# Altium PCB MPU6050EVM.PcbDoc
Units mil, origin at the board's own origin, x right, y up, seen from the top; angles counter-clockwise.
Board outline 6000 x 4000 mil, 2 copper layers (Top Layer, Bottom Layer); 35 components, 26 nets, 129 pads, 0 vias.
Unrouted connection lines stored in the file: 79.
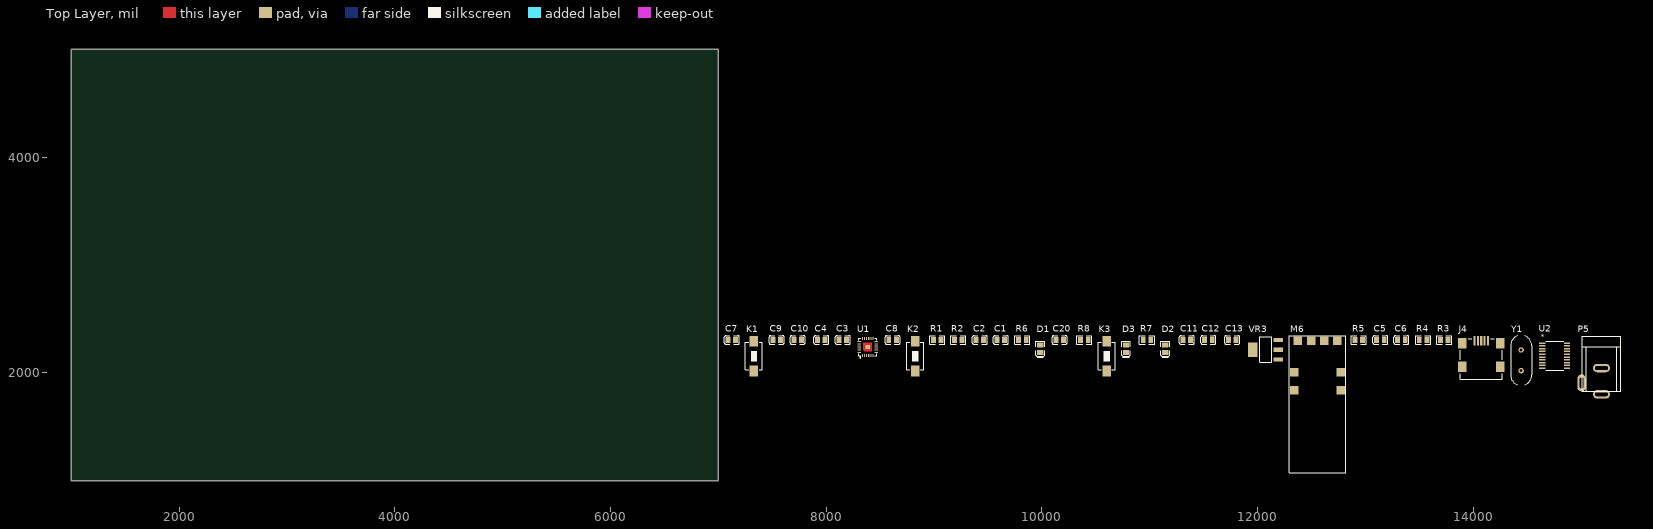
[diagram p0: Top Layer view]
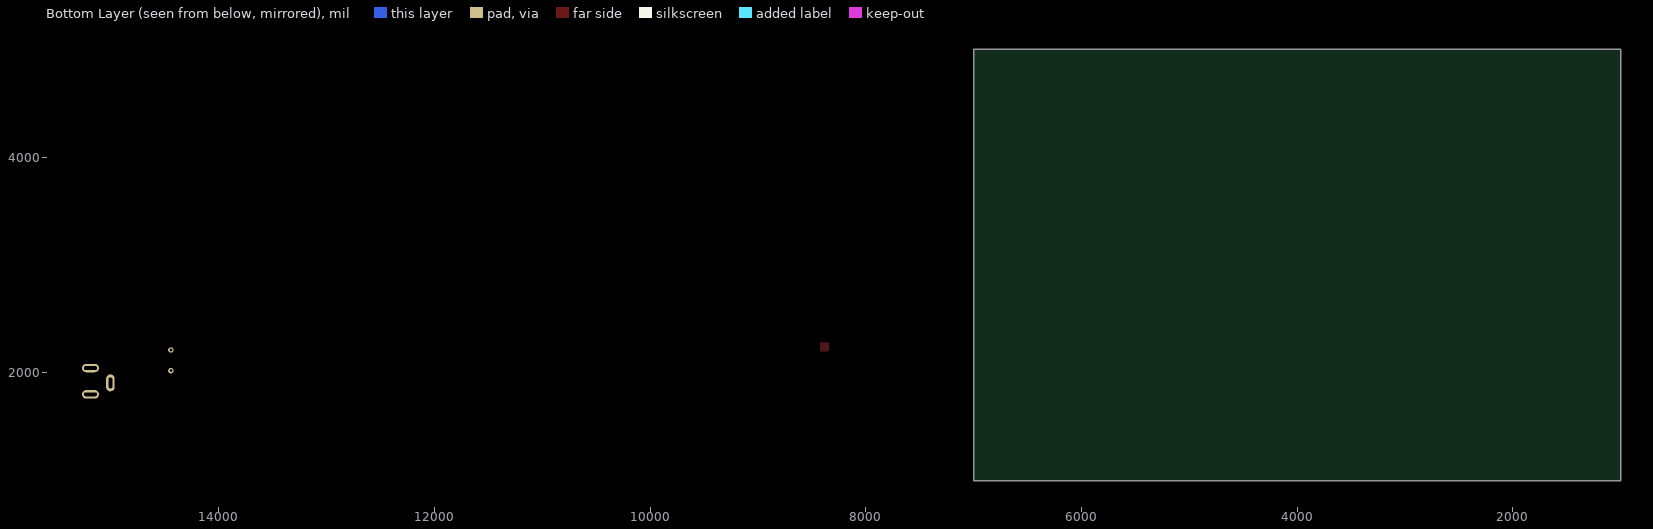
[diagram p1: Bottom Layer view, seen from below]

## Layer stack, top to bottom
Top Solder: solder mask 0.4, Solder Resist, Dk 3.5
Top Layer: signal copper 1.4
Dielectric 1: dielectric 12.6, FR-4, Dk 4.8
Bottom Layer: signal copper 1.4
Bottom Solder: solder mask 0.4, Solder Resist, Dk 3.5

## Board outline
1000,1000 7000,1000 7000,5000 1000,5000

## Design rules (kind name [scope] priority, off if disabled: settings)
Clearance [All] p1: gap=6 ignorepadtopadclearanceinfootprint=FALSE
HoleSize [All] p1: absolutevalues=TRUE maxlimit=10000 minlimit=12 maxpercent=80.000 minpercent=20.000
MinimumSolderMaskSliver [All] p1: minsoldermaskwidth=0
PolygonConnect [All] p1: thpad.connectstyle=Relief thpad.reliefconductorwidth=10 thpad.reliefentries=4 thpad.polygonreliefangle="90 Angle" thpad.airgapwidth=10 smdpad.connectstyle=Relief smdpad.reliefconductorwidth=10 smdpad.reliefentries=4 smdpad.polygonreliefangle="90 Angle" smdpad.airgapwidth=10 via.connectstyle=Direct via.reliefconductorwidth=10 via.reliefentries=4 via.polygonreliefangle="90 Angle" via.airgapwidth=10
RoutingVias [All] p1: holewidth=12 width=24 viastyle="Through Hole" minholewidth=12 minwidth=24 maxholewidth=28 maxwidth=50
SilkToSilkClearance [All] p1: silktosilkclearance=0
SilkToSolderMaskClearance [IsPad] p1: minsilkscreentomaskgap=0 clearancetoexposedcopper=TRUE
SolderMaskExpansion [All] p1: expansion=4
Width [All] p1: maxlimit=1000 minlimit=6 preferedwidth=10
26 further rules are at their usual default settings.

## Components (designator, comment, footprint, x,y, rotation, side; value= is the part's Value field where it differs from the comment)
C1 "2.2nF" 0805_C 9620,2305 r0 top
C2 "100nF" 0805_C 9425,2305 r0 top
C3 "100nF" 0805_C 8155,2305 r0 top
C4 "100nF" 0805_C 7955,2305 r0 top
C5 "9pF" 0805_C 13140,2305 r0 top
C6 "9pF" 0805_C 13335,2305 r0 top
C7 "100nF" 0805_C 7125,2305 r0 top
C8 "100nF" 0805_C 8615,2305 r0 top
C9 "100nF" 0805_C 7540,2305 r0 top
C10 "100nF" 0805_C 7735,2305 r0 top
C11 "100nF" 0805_C 11345,2305 r0 top
C12 "10uF" 0805_C 11545,2305 r0 top
C13 "10uF" 0805_C 11765,2305 r0 top
C20 "100nF" 0805_C 10165,2305 r0 top
D1 "翠绿 0805" 0805_LED_S1 9985,2225 r90 top
D2 "红灯 0805" 0805_LED_S1 11145,2225 r90 top
D3 "红灯 0805" 0805_LED_S1 10780,2225 r90 top
J4 "UsbOtg" USB-MINI-A 14075,2175 r0 top
K1 "SW" SWITCH 7330,2155 r0 top
K2 "SW" SWITCH 8825,2155 r0 top
K3 "SW" SWITCH 10600,2155 r0 top
M6 "Pl2303EVM" PI230203EVM 12555,1790 r0 top
P5 "Power" DC-005 15190,2045 r90 top
R1 "4.7KΩ" 0805_R 9030,2305 r0 top
R2 "4.7KΩ" 0805_R 9225,2305 r0 top
R3 "10MΩ" 0805_R 13730,2305 r0 top
R4 "100KΩ" 0805_R 13535,2305 r0 top
R5 "100KΩ" 0805_R 12940,2305 r0 top
R6 "1KΩ" 0805_R 9820,2305 r0 top
R7 "1KΩ" 0805_R 10975,2305 r0 top
R8 "1KΩ" 0805_R 10395,2305 r0 top
U1 "MPU6050" "QFN24 4x4_L" 8385,2240 r0 top
U2 "STM32F03xFxP" TSSOP20 14755,2160 r0 top value=Value
VR3 "AMS1117-3.3" SOT-223 12075,2215 r0 top
Y1 "8MHz" XTAL_US 14445,2020 r90 top

## Footprints (in the part's own frame and the unit in brackets; to place one, negate y for a bottom-side part, rotate by r counter-clockwise, add the part's x,y. Pads: shape width x height; smd on the part's side, far side on the other; paste and mask are expansions set on the pad)
0805_C [mm]
  rect 1.16x1.47 smd: 1(-0.89,0) 2(0.89,0)
  silkscreen extent -1.77,-1.04 1.77,1.04, body extent -1,-0.62 1,0.63, height 0.77
0805_LED_S1 [mm]
  rect 1.16x1.47 smd: A(0.89,0) K(-0.89,0)
  silkscreen extent -2.24,-1.04 1.77,1.03, body extent -1.01,-0.62 1.01,0.62, height 1.1
0805_R [mm]
  rect 1.16x1.47 smd: 1(-0.89,0) 2(0.89,0)
  silkscreen extent -1.77,-1.04 1.77,1.03, body extent -1,-0.62 1,0.63, height 0.49
DC-005 [mm] "5.5*2.1mm，DC30V,2.5A"
  oval 2x4 hole 0.8 slot 3 at 90 deg: 1(-6.2,0) 2(0,0)
  oval 4x2 hole 0.8 slot 2.5 at 0 deg: 2(-3.5,4.7)
  silkscreen extent -5.48,-4.5 7.5,4.5, body extent -6.55,-4.5 7.5,4.8, height 11.2
PI230203EVM [mm]
  rect 2x2 smd: 0(-5.405,1.206) 0(5.52,5.524) 1(-5.405,5.524) 1(-4.578,12.955) 2(1.603,12.955) 2(5.52,1.206) 3(4.693,12.955) 4(-1.488,12.955)
  Top Overlay keep-out lines w0.102: -6.575,-18.225 6.675,-18.225 6.675,14.1 -6.575,14.1 -6.575,-18.225
  silkscreen extent -6.58,-18.23 6.68,14.1, body extent -6,-18.28 6.12,13.62, height 1
"QFN24 4x4_L" [mm] "24脚，长x宽x高：4x4x1mm，脚距：0.5mm"
  rect 0.25x0.8 smd: 1(-1.25,-2)
  oval 0.25x0.8 smd: 2(-0.75,-2) 3(-0.25,-2) 4(0.25,-2) 5(0.75,-2) 6(1.25,-2) 13(1.25,2) 14(0.75,2) 15(0.25,2) 16(-0.25,2) 17(-0.75,2) 18(-1.25,2)
  oval 0.8x0.25 smd: 7(2,-1.25) 8(2,-0.75) 9(2,-0.25) 10(2,0.25) 11(2,0.75) 12(2,1.25) 19(-2,1.25) 20(-2,0.75) 21(-2,0.25) 22(-2,-0.25) 23(-2,-0.75) 24(-2,-1.25)
  rect 1x1 smd: 25(0,0)
  Top Layer region: -1,1 1,1 1,-1 -0.75,-1 -1,-0.75
  silkscreen extent -2.11,-2.6 2.11,2.11, body extent -2.01,-2.01 2.01,2.01, height 0.95
SOT-223 [mm]
  rect 2.2x1 smd: 1(3,-2.3) 2(3,0) 3(3,2.3)
  rect 2.2x3.5 smd: 2(-3,0)
  silkscreen extent -1.4,-3 1.4,3, body extent -3.49,-3.24 3.49,3.24, height 1.64
SWITCH [mm]
  rect 2x2.5 smd: 1(0,3.5) 2(0,-3.5)
  silkscreen extent -2,-3.25 2,3.25, body extent -2.03,-3.23 2.03,3.25, height 1.2
TSSOP20 [mil]
  rect 58x14 smd: 1(-115,115.16) 2(-115,89.57) 3(-115,63.98) 4(-115,38.39) 5(-115,12.8) 6(-115,-12.8) 7(-115,-38.39) 8(-115,-63.98) 9(-115,-89.57) 10(-115,-115.16) 11(115,-115.16) 12(115,-89.57) 13(115,-63.98) 14(115,-38.39) 15(115,-12.8) 16(115,12.8) 17(115,38.39) 18(115,63.98) 19(115,89.57) 20(115,115.16)
  silkscreen extent -83,-135 83,135, body extent -130,-130 130,130, height 47
USB-MINI-A [mm] "MINI型USB，7.9*7.5*4.1mm"
  rect 2x2.5 smd: 0(-4.45,-3) 0(-4.45,2.5) 0(4.45,-3) 0(4.45,2.5)
  rect 0.5x2.3 smd: 1(-1.6,3.108) 2(-0.8,3.108) 3(0,3.108) 4(0.8,3.108) 5(1.6,3.108)
  round 0.6 hole 0.9 unplated: MH1(2.2,0) MH2(-2.2,0)
  silkscreen extent -4.95,-5.95 4.95,3.65, body extent -4.75,-6 4.75,3.7, height 3.95
XTAL_US [mil]
  round 50 hole 28: 1(0,0) 2(192.13,0)
  silkscreen extent -131,-98 323,98

## Part data
C1 C2 C3 C4: library part "0805 2.2nF (222) 5% 50V", "贴片电容", Package=0805, SuppliersPartNumber=C28260, ComponentLink1Description=供应商链接, ComponentLink1URL=http://www.szlcsc.com/product/details_29010.html, Supplier=LC
C5 C6 C7 C8 C9 C10 C20: library part "0805 10nF (103) 10% 50V", "贴片电容", Package=0805, SuppliersPartNumber=C1710, ComponentLink1Description=供应商链接, ComponentLink1URL=http://www.szlcsc.com/product/details_2062.html, Supplier=LC
C11 C12 C13: library part "0805 10uF (106) 10% 25V", "贴片电容", Package=0805, SuppliersPartNumber=C15850, ComponentLink1Description=供应商链接, ComponentLink1URL=http://www.szlcsc.com/product/details_16532.html, Supplier=LC
D1: library part "0805 翠绿", "发光二极管", Package=0805, SuppliersPartNumber=C2297, ComponentLink1Description=供应商链接, ComponentLink1URL=http://www.szlcsc.com/product/details_2670.html, Supplier=LC
D2 D3: library part "0805 红灯", "发光二极管", Package=0805, SuppliersPartNumber=C2295, ComponentLink1Description=供应商链接, ComponentLink1URL=http://www.szlcsc.com/product/details_2668.html, Supplier=LC
K1 K2 K3: "Switch"
R1 R2: library part "0805 4.7KΩ (4701) 1%", "贴片电阻", Package=0805, SuppliersPartNumber=C17673, ComponentLink1Description=供应商链接, ComponentLink1URL=http://www.szlcsc.com/product/details_18361.html, Supplier=LC
R3 R4 R5 R6 R7 R8: library part "0805 10KΩ (1002) 1%", "贴片电阻", Package=0805, SuppliersPartNumber=C17414, ComponentLink1Description=供应商链接, ComponentLink1URL=http://www.szlcsc.com/product/details_18102.html, Supplier=LC
U2: "Mcu", Manufacturer_Part_Number=stm32f03xfxp, C="Copyright (C) 2016 Accelerated Designs. All rights reserved", Copyright="Copyright (C) 2016 Accelerated Designs. All rights reserved", RefDes=RefDes, Type=Type, Vendor=STMicroelectronics
VR3: library part "SOT-223 AMS1117-3.3", "低压差线性稳压(LDO)", Package=SOT-223, SuppliersPartNumber=C6186, ComponentLink1Description=供应商链接, ComponentLink1URL=http://www.szlcsc.com/product/details_6652.html, Supplier=LC
Y1: library part XTAL, "Crystal Oscillator", LatestRevisionDate=17-Jul-2002, LatestRevisionNote="Re-released for DXP Platform.", Published=8-Jun-2000, Publisher="Altium Limited"

## Nets (pads, with @x,y where several pads share a name; then routed paths per layer and width w, separated by ;. In a path a pad name is that pad's centre, name@x,y a point inside that pad or via, vN(x,y) a via of type N, cw(c..) or ccw(c..) an arc to the next point about the centre after c; other vN are vias at no path point)
A1: R7.1 U2.7
A4: R8.1 U2.10
A5: U1.11 U2.11
A6: U1.12 U2.12
A7: U1.9 U2.13
B1: C20.1 K3.2 U2.14
GND: C1.2 C2.1 C3.2 C4.2 C5.1 C6.1 C7.2 C9.1 C10.1 C11.1 C12.1 C13.1 J4.5 K1.1 M6.2 P5.2 R1.1 R2.1 R5.1 R6.1 U1.18 U2.15 VR3.1
IIC_Scl_A9: R1.2 U1.23 U2.17
IIC_Sda_A10: R2.2 U1.24 U2.18
NetC1_1: C1.1 U1.20
NetC2_2: C2.2 U1.10
NetC5_2: C5.2 R3.1 U2.3 Y1.1
NetC6_2: C6.2 R3.2 U2.2 Y1.2
NetD1_K: D1.K R6.2
NetD2_K: D2.K R7.2
NetD3_K: D3.K R8.2
NetR5_2: R5.2 U2.1
Rst: C7.1 K1.2 R4.2 U2.4
SWCLK_A14: J4.3 U2.20
SWDIO_A13: J4.2 U2.19
USART1_RX_A3: M6.3 U2.9
USART1_TX_A2: M6.4 U2.8
V3: C3.1 C4.1
V5: C11.2 C12.2 J4.1 M6.1 P5.1 VR3.3
VA: C8.2 C9.2 C10.2 C13.2 C20.2 D1.A D2.A D3.A K2.1 K3.1 R4.1 U1.8 U1.13 U2.5 U2.16 VR3.2
WKUP_A0: C8.1 K2.2 U2.6
pads on no net: J4.0 J4.4 J4.MH1 J4.MH2 M6.0 U1.1 U1.2 U1.3 U1.4 U1.5 U1.6 U1.7 U1.14 U1.15 U1.16 U1.17 U1.19 U1.21 U1.22 U1.25

## Text inside footprints (layer, text, board x,y; h text height)
U2: Top Overlay "*" at 14625,2305 h50